# EAGLE board coil-control-module-v2 (EAGLE 7.4.0)
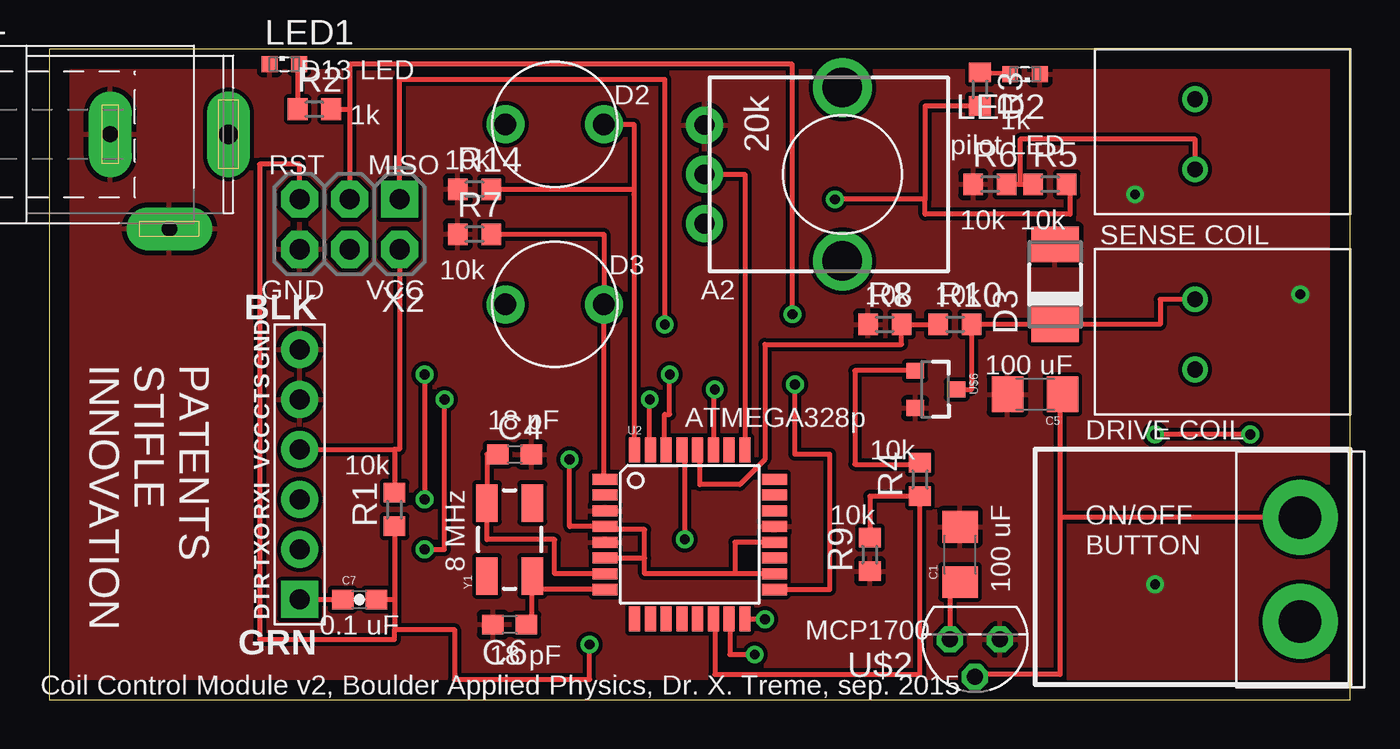
[diagram p0: board, top side]
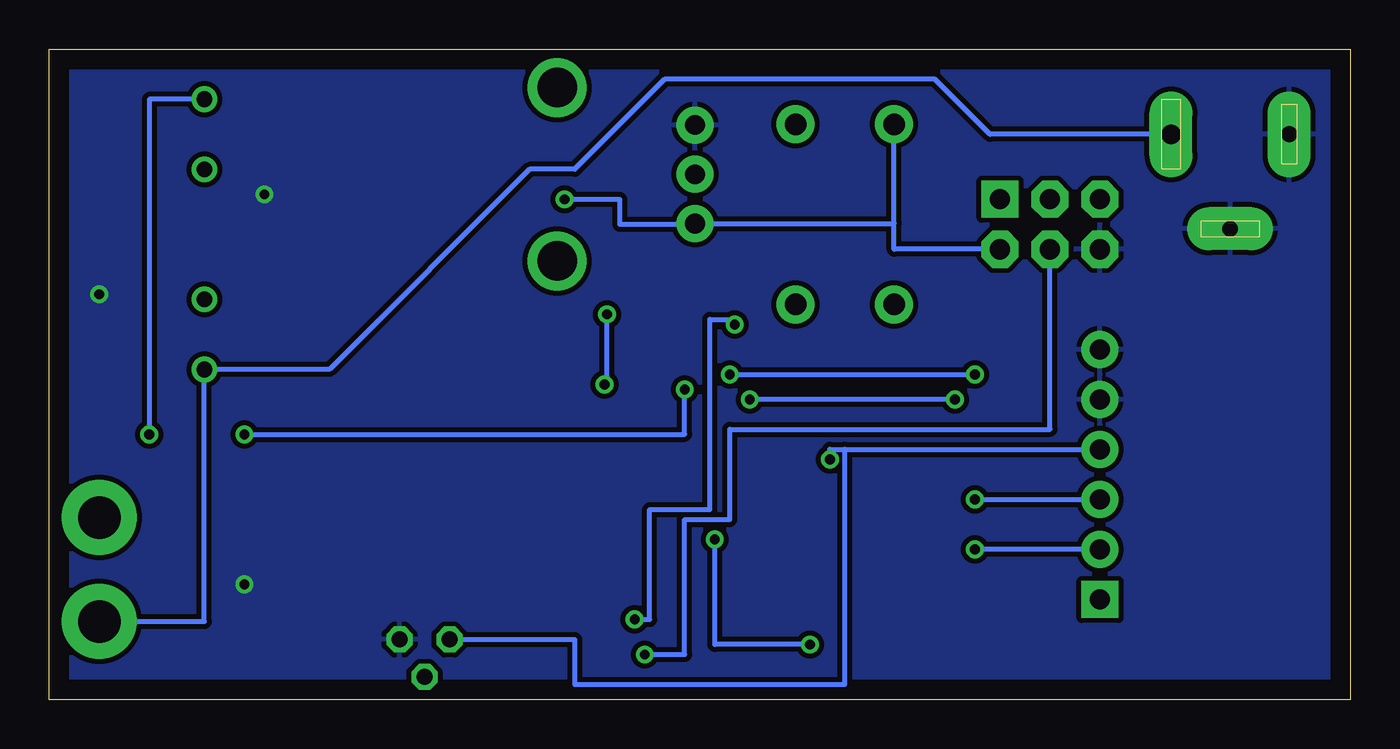
[diagram p1: board, bottom side, seen from below]

Size 66.04 x 33.02 mm. Coordinates in mm from the lower left corner, seen from the top.
Outline: 0,0 66.04,0 66.04,33.02 0,33.02 0,0
Copper layers (1*16): Top 0.035mm / dielectric 1.5mm / Bottom 0.035mm
Design rules "default": minimum track width 10mil, minimum drill 24mil, track to track 8mil, track to pad 8mil, pad to pad 8mil, via to via 8mil, smd to smd 8mil, copper to edge 40mil, drill to drill 8mil, minimum pad ring 10mil, minimum via ring 8mil, stop-mask expansion 4mil, vias tented up to drill 0mil, thermal gap 10mil
Net classes: 1 vcc: width 0.254 mm

## Footprints (pad centres in the part's own frame; a part is rotated, then mirrored left to right if it is on the bottom)
1206 = smd 1.6 x 1.8: 1 -1.4,0; 2 1.4,0
C0603 = smd 1.1 x 1: 1 -0.85,0; 2 0.85,0
0603-CAP = smd 1.1 x 1: 1 -0.85,0; 2 0.85,0
DO-214AC = smd 1.8 x 2.4: A 2.025,0; C -2.025,0
SPC4078 = drill 0.8 pad 2.184 long: 1 -3,0; 2 0,-4.8 | drill 1 pad 2.184 long: 3 3,0
SML0603 = smd 0.8 x 0.8: A 0.75,0; C -0.75,0
R0603 = smd 1 x 1.1: 1 -0.85,0; 2 0.85,0
ALPS_POT_KIT = drill 1 pad 1.88: P$1 7,-2.5; P$2 7,0; P$3 7,2.5 | drill 2: P$4 0,-4.4; P$5 0,4.4
TQFP32-08 = smd 1.27 x 0.559: 1 -4.293,2.8; 2 -4.293,2; 3 -4.293,1.2; 4 -4.293,0.4; 5 -4.293,-0.4; 6 -4.293,-1.2; 7 -4.293,-2; 8 -4.293,-2.8; 17 4.293,-2.8; 18 4.293,-2; 19 4.293,-1.2; 20 4.293,-0.4; 21 4.293,0.4; 22 4.293,1.2; 23 4.293,2; 24 4.293,2.8 | smd 0.559 x 1.27: 9 -2.8,-4.293; 10 -2,-4.293; 11 -1.2,-4.293; 12 -0.4,-4.293; 13 0.4,-4.293; 14 1.2,-4.293; 15 2,-4.293; 16 2.8,-4.293; 25 2.8,4.293; 26 2,4.293; 27 1.2,4.293; 28 0.4,4.293; 29 -0.4,4.293; 30 -1.2,4.293; 31 -2,4.293; 32 -2.8,4.293
CW182-ND = drill 2.159 pad 3.81: P$1 -2.642,0; P$2 2.642,0
TO92-3 = drill 0.813 octagon: 1 -1.27,0; 2 0,1.905; 3 1.27,0
SPRING-TERMINAL = drill 0.8: P$1 5.08,1.778; P$2 5.08,5.334
BUTTON = drill 1.1 pad 1.93: P$1 -2.499,0; P$2 2.499,0
SOT-23 = smd 0.8 x 0.9: 1 -0.95,-1; 2 0.95,-1; 3 0,1.1
FTDI_DEVICE_SIDE = drill 1.016 pad 1.88 square: P$1 -6.35,0 | drill 1.016 pad 1.88: P$2 -3.81,0; P$3 -1.27,0; P$4 1.27,0; P$5 3.81,0; P$6 6.35,0
2X3-NS = drill 1.016 pad 1.88 square: 1 -2.54,-1.27 | drill 1.016 pad 1.88 octagon: 2 -2.54,1.27; 3 0,-1.27; 4 0,1.27; 5 2.54,-1.27; 6 2.54,1.27
CRYSTAL-SMD-5X3 = smd 1.9 x 1.1: 1 -1.85,-1.15; 2 1.85,-1.15; 3 1.85,1.15; 4 -1.85,1.15

## Placement (x,y rotation side)
C1  100 uF  [1206]  46.23,7.37 90 top
C4  18pF  [C0603]  23.62,12.45 0 top
C5  100 uF  [1206]  50.04,15.49 180 top
C6  18pF  [C0603]  23.37,3.81 180 top
C7  100 nF  [0603-CAP]  15.75,5.08 0 top
D3  [DO-214AC]  51.05,21.08 90 top
J1  [SPC4078]  6.1,28.7 0 top
LED1  [SML0603]  11.94,32.26 0 top
LED2  [SML0603]  49.53,31.75 180 top
R1  10K  [R0603]  17.53,9.65 90 top
R2  3.3k  [R0603]  13.46,29.97 0 top
R3  3.3k  [R0603]  47.24,30.99 270 top
R4  10K  [R0603]  44.2,11.18 90 top
R5  10K  [R0603]  50.8,26.16 0 top
R6  10K  [R0603]  47.75,26.16 0 top
R7  10K  [R0603]  21.59,23.62 0 top
R8  10K  [R0603]  42.42,19.05 0 top
R9  10K  [R0603]  41.66,7.37 90 top
R10  10K  [R0603]  45.97,19.05 0 top
R13  20k  [ALPS_POT_KIT]  40.26,26.67 180 top
R14  10K  [R0603]  21.59,25.91 0 top
U2  ATMEGA328P  [TQFP32-08]  32.51,8.38 0 top
U$1  CW182-ND  [CW182-ND]  63.5,6.6 90 top
U$2  MCP1700  [TO92-3]  46.99,3.05 180 top
U$3  SPRING-TERMINAL  [SPRING-TERMINAL]  53.09,25.15 0 top
U$4  BUTTON  [BUTTON]  25.65,20.07 0 top
U$6  IRLML0060  [SOT-23]  44.96,15.75 270 top
U$7  BUTTON  [BUTTON]  25.65,29.21 0 top
U$8  SPRING-TERMINAL  [SPRING-TERMINAL]  53.09,14.99 0 top
X1  FTDI_DEVICE  [FTDI_DEVICE_SIDE]  12.7,11.43 90 top
X2  [2X3-NS]  15.24,24.13 180 top
Y1  16 MHz  [CRYSTAL-SMD-5X3]  23.37,8.13 90 top

## Library data of the parts
C1 C5 = SparkFun-Capacitors
C4 C6 R1-R10 R14 = resistor
C7 = SparkFun-Passives
D3 = diode
J1 = con-jack; OC_FARNELL: unknown; OC_NEWARK: unknown
LED1 LED2 = led
R13 = SparkFun-Electromechanical
U2 = SparkFun-DigitalIC; PROD_ID: IC-09069
U$1-U$4 U$6-U$8 = spietz-library
X1 X2 = SparkFun-Connectors
Y1 = SparkFun-FreqCtrl

## Nets
/RST: C7.2 R1.1 U2.29 X2.5
A2: R13.P$2 U2.25
A5: R8.2 R10.1 U2.28
D2: R14.2 U2.32 U$7.P$2
D3: R7.2 U2.1 U$4.P$2
D5: U2.9
D6: U2.10
D9: U2.13
D10: R4.1 R9.2 U2.14
GND: C1.2 C4.2 C5.2 C6.2 D3.A J1.1 J1.2 LED1.C LED2.C R6.1 R7.1 R8.1 R9.1 R13.P$1 R14.1 U2.3 U2.5 U2.21 U$2.1 U$6.2 X1.P$5 X1.P$6 X2.6
GRN: C7.1 X1.P$1
MIDV: R5.1 R6.2 U$3.P$1
MISO: U2.16 X2.1
MOSI: U2.15 X2.4
N$3: D3.C R10.2 U$6.3 U$8.P$2
N$4: C4.1 U2.7 Y1.3
N$10: LED1.A R2.1
N$11: C6.1 U2.8 Y1.1
N$13: LED2.A R3.1
N$27: R4.2 U$6.1
RX: U2.30 X1.P$3
SCK: R2.2 U2.17 X2.3
SENSECOIL: U2.27 U$3.P$2
TX: U2.31 X1.P$2
VCC: C1.1 R1.2 R3.2 R5.2 R13.P$3 U2.4 U2.6 U2.18 U2.20 U$2.3 U$7.P$1 X1.P$4 X2.2
VIN: C5.1 U$1.P$2 U$2.2
VPOWER: J1.3 U$1.P$1 U$8.P$1

## Tracks (layer width: path | path; a pad name or v marks a point on that pad's centre or on a via)
/RST  (via drill 0.5)
  Top 0.254: C7.2 17.53,5.08 | U2.29 32.26,12.68 v32.26,8.13 | R1.1 17.53,5.08 | 17.53,5.08 17.53,3.56 | 17.53,3.56 20.57,3.56 20.57,1.02 27.43,1.02 v27.43,2.79 | X2.5 12.7,27.18 10.67,27.18 10.67,3.05 17.53,3.05 17.53,3.56
  Bottom 0.254: v27.43,2.79 32.26,2.79 v32.26,8.13
A2
  Top 0.254: R13.P$2 35.31,26.67 U2.25
A5
  Top 0.254: U2.28 33.02,12.57 33.02,10.92 35.05,10.92 36.32,12.19 36.32,18.03 43.27,18.03 R8.2 R10.1
D2
  Top 0.254: U2.32 29.68,12.68 29.68,25.65 29.68,25.91 | U$7.P$2 29.68,29.21 29.68,25.91 | R14.2 29.68,25.91
D3
  Top 0.254: U2.1 28.15,11.18 U$4.P$2 28.15,23.62 R7.2
D10
  Top 0.254: U2.14 33.78,4.09 33.78,1.27 44.2,1.27 R4.1 41.66,10.33 R9.2
GND  (via drill 0.5)
  other vias: 56.13,5.84 63.5,20.57 55.12,25.65
  pour Top (isolate 0.152): -1.27,35.31 -1.27,-1.27 67.56,-0.76 67.56,35.31
  pour Bottom (isolate 0.254): -2.54,36.2 -2.54,-2.54 69.6,-1.52 69.6,36.2
GRN
  Top 0.254: X1.P$1 C7.1
MIDV
  Top 0.254: R6.2 49.28,26.16 | 49.28,26.16 R5.1 | U$3.P$1 58.17,28.45 49.28,28.45 49.28,26.16
MISO  (via drill 0.5)
  Top 0.254: X2.1 17.78,31.5 31.24,31.5 v31.24,19.05 | U2.16 36.32,4.09 v36.32,4.06
  Bottom 0.254: v36.32,4.06 35.56,4.06 35.56,9.65 32.51,9.65 32.51,19.3 31.24,19.3 v31.24,19.05
MOSI  (via drill 0.5)
  Top 0.254: U2.15 34.54,4.09 34.54,2.29 v35.81,2.29
  Bottom 0.254: v35.81,2.29 33.78,2.29 33.78,9.14 31.5,9.14 31.5,13.72 15.24,13.72 X2.4
N$3
  Top 0.254: U$8.P$2 56.39,20.32 56.39,19.05 D3.C | D3.C | D3.C R10.2 46.82,15.75 U$6.3
N$4
  Top 0.254: U2.7 25.65,6.38 25.65,8.13 22.22,8.13 Y1.3 22.22,12.45 C4.1
N$10
  Top 0.254: LED1.A 12.61,32.26 R2.1
N$11
  Top 0.254: U2.8 25.03,5.58 Y1.1 24.52,3.81 C6.1
N$13
  Top 0.254: LED2.A 49.02,31.75 R3.1
N$27
  Top 0.254: U$6.1 40.89,16.7 40.89,11.94 44.2,11.94 R4.2
RX  (via drill 0.5)
  Top 0.254: U2.30 31.24,12.68 31.24,14.48 31.5,14.48 v31.5,16.51 | v19.05,16.51 v19.05,10.16
  Bottom 0.254: v31.5,16.51 v19.05,16.51 | v19.05,10.16 X1.P$3
SCK  (via drill 0.5)
  Top 0.254: U2.17 39.62,5.58 39.62,12.45 37.85,12.45 v37.85,16 | v37.72,19.56 37.72,32.26 15.24,32.26 15.24,29.97 | 15.24,29.97 X2.3 | R2.2 15.24,29.97
  Bottom 0.254: v37.85,16 37.72,16 v37.72,19.56
SENSECOIL  (via drill 0.5)
  Top 0.254: v60.96,13.46 v56.13,13.46 | v33.78,15.75 33.71,15.75 U2.27
  Bottom 0.254: U$3.P$2 60.96,30.48 v60.96,13.46 | v56.13,13.46 33.78,13.46 v33.78,15.75
TX  (via drill 0.5)
  Top 0.254: U2.31 30.48,12.68 v30.48,15.24 | v19.05,7.62 20.07,7.62 v20.07,15.24
  Bottom 0.254: X1.P$2 v19.05,7.62 | v20.07,15.24 v30.48,15.24
VCC  (via drill 0.5)
  Top 0.254: X1.P$4 17.53,12.7 | 17.53,12.7 R1.2 | U2.6 30.23,7.18 | 30.23,7.18 30.23,8.64 28.22,8.64 U2.4 26.42,8.78 v26.42,12.19 | U2.18 34.8,6.38 | 34.8,6.38 30.23,6.38 30.23,7.18 | U2.20 34.8,7.98 34.8,6.38 | X2.2 17.78,12.7 17.53,12.7 | C1.1 45.72,5.97 U$2.3 | R3.2 44.45,30.14 44.45,25.4 | 44.45,25.4 v39.88,25.4 | R5.2 51.82,26.16 51.82,24.64 44.45,24.64 44.45,25.4
  Bottom 0.254: X2.2 23.16,22.86 23.16,24.17 | 23.16,24.17 U$7.P$1 | 23.16,24.17 R13.P$3 33.26,24.13 37.08,24.13 37.08,25.4 v39.88,25.4 | v26.42,12.19 26.42,12.7 25.65,12.7 | 25.65,12.7 X1.P$4 | U$2.3 39.37,3.05 39.37,0.76 25.65,0.76 25.65,12.7
VIN
  Top 0.254: C5.1 51.31,15.49 51.31,9.25 | 51.31,9.25 51.31,1.27 46.99,1.27 U$2.2 | U$1.P$2 51.31,9.25
VPOWER
  Bottom 0.254: J1.3 18.29,28.7 21.08,31.5 34.8,31.5 39.37,26.92 41.66,26.92 51.82,16.76 U$8.P$1 58.17,3.96 U$1.P$1

## Text on the board
tPlace: D13 LED | D2 | 1k | 1k | pilot LED | RST | MISO | 10k | 10k | 10k | D3 | SENSE COIL | 10k | GND | VCC | A2 | 10k | 10k | PATENTS / STIFLE / INNOVATION | 100 uF | 18 pF | ATMEGA328p | 10k | DRIVE COIL | 10k | 8 MHz | 10k | 100 uF | ON/OFF / BUTTON | 0.1 uF | MCP1700 | 18 pF | Coil Control Module v2, Boulder Applied Physics, Dr. X. Treme, sep. 2015